# Altium PCB Zenith Solar Panel.PcbDoc (part 1 of 2)
Units mm, origin at the board's own origin, x right, y up, seen from the top; angles counter-clockwise.
Board outline 327.5 x 87 mm, 2 copper layers (Top Layer, Bottom Layer), stack 1.58 mm thick; 57 components, 37 nets, 206 pads, 1487 vias.
Unrouted connection lines stored in the file: 41.
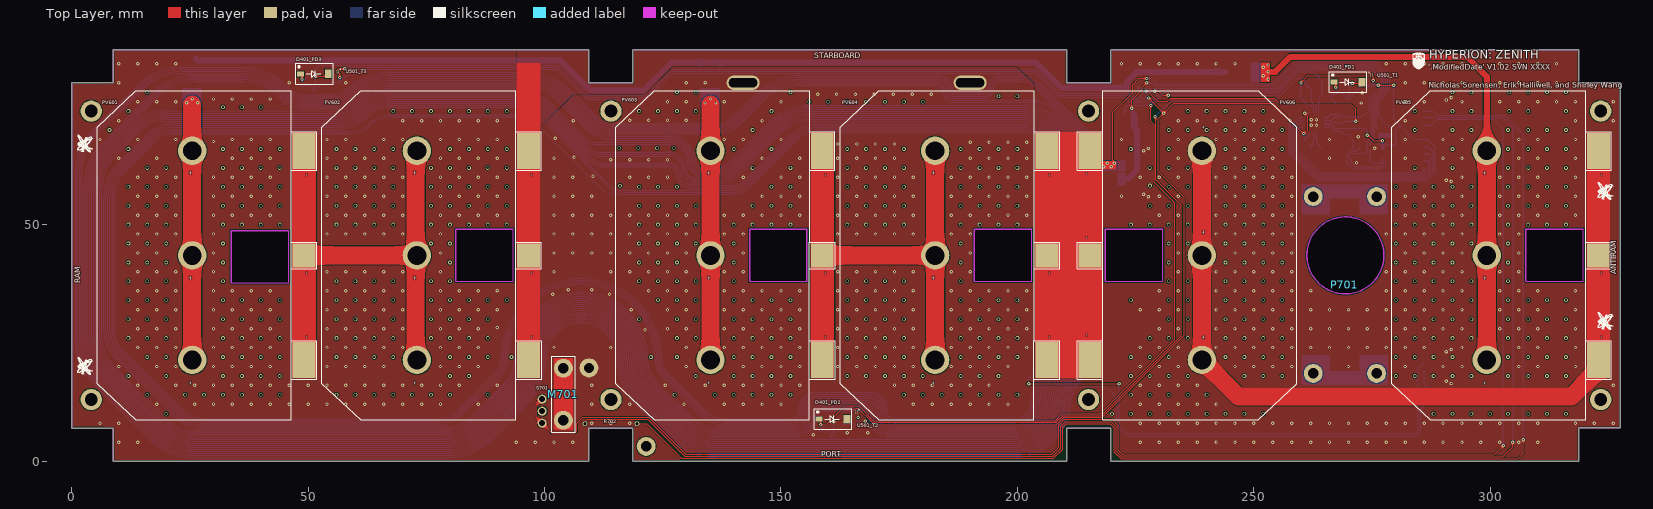
[diagram p0: Top Layer view]
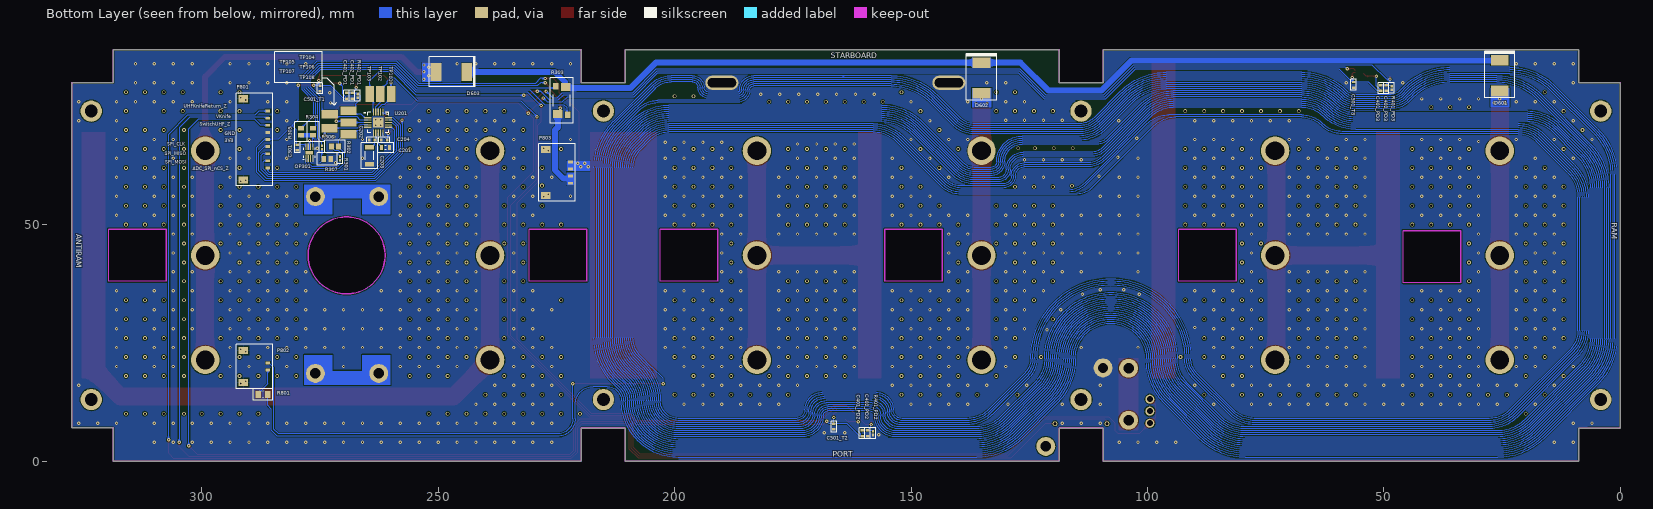
[diagram p1: Bottom Layer view, seen from below]

## Layer stack, top to bottom
Top Solder: solder mask 0.0102, Solder Resist, Dk 3.5
Top Layer: signal copper 0.0356
Dielectric 1: dielectric 1.509, FR-4, Dk 4.8
Bottom Layer: signal copper 0.0356
Bottom Solder: solder mask 0.0102, Solder Resist, Dk 3.5

## Board outline
0,6.985 8.8,6.985 8.8,0 109.4,0 109.4,6.985 118.7,6.985 118.7,0 210.4,0 210.4,6.985 219.7,6.985 219.7,0 318.703,0 318.699,7 327.5,7 327.5,80 318.699,80 318.699,87 219.7,87 219.7,80 210.4,80 210.4,87 118.7,87 118.7,80 109.4,80 109.4,87 8.8,87 8.8,80 0,80
cut-out: 263.6,49.25 cw(c269.35,43.5) 275.1,49.25 cw(c269.35,43.5) 275.1,37.75 cw(c269.35,43.5) 263.6,37.75 cw(c269.35,43.5)
cut-out: 319.65,49 307.5,49 307.5,38 319.65,38
cut-out: 218.6,38 230.75,38 230.75,49 218.6,49
cut-out: 203,49 190.85,49 190.85,38 203,38
cut-out: 155.5,49 143.35,49 143.35,38 155.5,38
cut-out: 45.9,48.75 33.75,48.75 33.75,37.75 45.9,37.75
cut-out: 93.4,49 81.25,49 81.25,38 93.4,38

## Design rules (kind name [scope] priority, off if disabled: settings)
BoardOutlineClearance [All] p1: gap=0.254 ignorepadtopadclearanceinfootprint=FALSE
Clearance [All] p1: gap=0.178 ignorepadtopadclearanceinfootprint=FALSE
HoleSize [All] p1: absolutevalues=TRUE maxlimit=10.16 minlimit=0.3 maxpercent=80.000 minpercent=20.000
MinimumSolderMaskSliver [All] p1: minsoldermaskwidth=0.127
PlaneConnect [All] p1: planeconnectstyle=Direct reliefexpansion=0.508 reliefentries=4 reliefconductorwidth=0.254 reliefairgap=0.254
PolygonConnect [All] p1: connectstyle=Direct reliefconductorwidth=0.254 reliefentries=4 polygonreliefangle="90 Angle" airgapwidth=0.254
RoutingCorners RoutingCorners_1 [All] p1: cornerstyle=45-Degree minsetback=2.54 maxsetback=2.54
RoutingCorners [All] p2: cornerstyle=Round minsetback=2.54 maxsetback=2.54
RoutingVias [All] p1: holewidth=0.33 width=0.711 viastyle="Through Hole" minholewidth=0.2 minwidth=0.711 maxholewidth=6 maxwidth=1.27
SilkToSilkClearance [All] p1: silktosilkclearance=0
SilkToSolderMaskClearance [IsPad] p1: minsilkscreentomaskgap=0.025 clearancetoexposedcopper=TRUE
SolderMaskExpansion [All] p1: expansion=0.013 istentingtop=FALSE
UnRoutedNet [All] p1: checkbadconnections=TRUE
Width [All] p1: maxlimit=10.16 minlimit=0.203 preferedwidth=0.254
23 further rules are at their usual default settings.

## Classes and differential pairs
channel class Temp_Sensor: T1 T2 T3
channel class Photodiode_Sun_Sensor: PD1 PD2 PD3
component class Zenith: TP101 TP102 TP103 TP104 TP105 TP106 TP107 TP108
component class "Zenith Headers": P801 P802 P803 R801
component class T3: C501_T3 U501_T3
component class T2: C501_T2 U501_T2
component class T1: C501_T1 U501_T1
component class PD3: C401_PD3 C402_PD3 D401_PD3 R401_PD3
component class PD2: C401_PD2 C402_PD2 D401_PD2 R401_PD2
component class PD1: C401_PD1 C402_PD1 D401_PD1 R401_PD1
component class "Mechanical Interfacing": M701 P701 R702 S701
component class "Current and Voltage Sensors": C301 OP301 R301 R302 R303 R304 R305 R306 R307
net class VIN[0..7]: VIN0 VIN1 VIN2 VIN3 VIN4 VIN5 VIN6 VIN7
component class "Photovoltaic Array": D601 D602 D603 PV601 PV602 PV603 PV604 PV605 PV606
component class "U_AD7298 12-Bit SPI ADC": C201 C202 C203 C204 U201

## Components (designator, comment, footprint, x,y, rotation, side; value= is the part's Value field where it differs from the comment)
C201 "" TDK-CGA3E 261.11,66.26 r0 bottom value=1µF
C202 "" TDK-CGA2B 263.98,67.89 r0 bottom value=0.1µF
C203 "" TDK-CGA5L 264.51,64.565 r270 bottom value=10µF
C204 "" TDK-CGA2B 261.38,67.89 r0 bottom value=0.1µF
C301 "Cap" TDK-CGA2B 279.75,66.33 r90 bottom value=0.1µF
C401_PD1 "Cap" TDK-CGA2B 269.335,77.24 r270 bottom value=0.1µF (schematic designator C401)
C401_PD2 "Cap" TDK-CGA2B 160.33,5.89 r270 bottom value=0.1µF (schematic designator C401)
C401_PD3 "Cap" TDK-CGA2B 50.66,78.87 r270 bottom value=0.1µF (schematic designator C401)
C402_PD1 "Cap" TDK-CGA2B 268.18,77.24 r90 bottom value=100pF (schematic designator C402)
C402_PD2 "Cap" TDK-CGA2B 159.18,5.89 r90 bottom value=100pF (schematic designator C402)
C402_PD3 "Cap" TDK-CGA2B 49.51,78.87 r90 bottom value=100pF (schematic designator C402)
C501_T1 "Cap" TDK-CGA2B 274.97,78.79 r90 bottom value=0.1µF (schematic designator C501)
C501_T2 "Cap" TDK-CGA2B 166.31,7.29 r90 bottom value=0.1µF (schematic designator C501)
C501_T3 "Cap" TDK-CGA2B 56.4,79.56 r90 bottom value=0.1µF (schematic designator C501)
D401_PD1 "PDB-C160SMCT-ND" PDB-C160SM 266.97,80.15 r0 top (schematic designator D401)
D401_PD2 "PDB-C160SMCT-ND" PDB-C160SM 158.05,8.89 r0 top (schematic designator D401)
D401_PD3 "PDB-C160SMCT-ND" PDB-C160SM 48.37,81.87 r0 top (schematic designator D401)
D601 "MBRS410L" ONS-875 25.5,81.508 r90 bottom
D602 "MBRS410L" ONS-875 135.1,81 r90 bottom
D603 "MBRS410L" ONS-875 247.2,82.3 r180 bottom
M701 "Antenna_Saddle" ANTENNA_SADDLE 104,19.625 r270 top
OP301 "OPA2333" TI-DSG0008A 277.22,65.215 r90 bottom
P701 "Cubesense Mount" CUBESENSE_MOUNT 269.35,43.5 r270 top
P801 "WM25695CT-ND" MOLX-5040500991 286,68 r270 bottom
P802 "WM25693CT-ND" MOLX-5040500291 286,20 r270 bottom
P803 "WM10137CT-ND" MOLX-5040500491 222,61 r270 bottom
PV601 "XTJPrime" "XTJ PRIME" 25.5,43.5 r270 top
PV602 "XTJPrime" "XTJ PRIME" 73,43.5 r270 top
PV603 "XTJPrime" "XTJ PRIME" 135.1,43.5 r270 top
PV604 "XTJPrime" "XTJ PRIME" 182.6,43.5 r270 top
PV605 "XTJPrime" "XTJ PRIME" 299.25,43.5 r270 top
PV606 "XTJPrime" "XTJ PRIME" 239,43.5 r90 top
R301 "0.1% 1/16W" PANA-ERA2A 270.75,64.024 r270 bottom value=6.2k
R302 "0.1% 1/8W" PANA-ERA6A 271.8,66.5 r180 bottom value=1M
R303 "Res Sense" VSH-2512R4C 223.855,76.215 r270 bottom value=0.01
R304 "0.1% 1/8W" PANA-ERA6A 276.425,69.65 r270 bottom value=1M
R305 "0.1% 1/8W" PANA-ERA6A 279.025,69.65 r270 bottom value=845k
R306 "0.1% 1/16W" PANA-ERA2A 274.56,66.326 r270 bottom value=6.2k
R307 "0.1% 1/8W" PANA-ERA6A 273.45,63.885 r180 bottom value=1M
R401_PD1 "0.1% 1/16W" PANA-ERA2A 267.02,77.24 r90 bottom value=24k (schematic designator R401)
R401_PD2 "0.1% 1/16W" PANA-ERA2A 158.03,5.894 r90 bottom value=24k (schematic designator R401)
R401_PD3 "0.1% 1/16W" PANA-ERA2A 48.36,78.876 r90 bottom value=24k (schematic designator R401)
R702 "Res3" VSH-CPF1 119.55,7.9 r180 top value=21
R801 "Res3" VSH-0805MCU 287.025,14.088 r180 bottom value=0
S701 "AV4424" PANA-AV4424 99.5,8 r90 top
TP101 "5017" KS-5017#1 259.71,77.443 r270 bottom
TP102 "5017" KS-5017#2 261.84,77.443 r90 bottom
TP103 "5017" KS-5017#3 264.48,77.59 r90 bottom
TP104 "5017" KS-5017#4 268.98,74.09 r180 bottom
TP105 "5017" KS-5017#4 272.924,73.34 r180 bottom
TP106 "5017" KS-5017#4 268.98,71.59 r180 bottom
TP107 "5017" KS-5017#4 272.98,70.34 r180 bottom
TP108 "5017" KS-5017#4 268.98,69.09 r180 bottom
U201 "AD7298" ADI-CP-20-8 262.68,71.59 r180 bottom
U501_T1 "LMT70" TI-YFQ0004 274.86,81.65 r0 top (schematic designator U501)
U501_T2 "LMT70" TI-YFQ0004 165.94,10.39 r270 top (schematic designator U501)
U501_T3 "LMT70" TI-YFQ0004 56.27,82.3 r270 top (schematic designator U501)

## Footprints (in the part's own frame and the unit in brackets; to place one, negate y for a bottom-side part, rotate by r counter-clockwise, add the part's x,y. Pads: shape width x height; smd on the part's side, far side on the other; paste and mask are expansions set on the pad)
ADI-CP-20-8 [mm] "QFN, 20-Leads, Body 4.00x4.00mm, Pitch 0.50mm, Thermal Pad 2.55x2.55mm, IPC Low Density"
  rect 1.5x0.25 smd: 1(-2.2,1) 2(-2.2,0.5) 3(-2.2,0) 4(-2.2,-0.5) 5(-2.2,-1) 11(2.2,-1) 12(2.2,-0.5) 13(2.2,0) 14(2.2,0.5) 15(2.2,1)
  rect 0.25x1.5 smd: 6(-1,-2.2) 7(-0.5,-2.2) 8(0,-2.2) 9(0.5,-2.2) 10(1,-2.2) 16(1,2.2) 17(0.5,2.2) 18(0,2.2) 19(-0.5,2.2) 20(-1,2.2)
  rect 2.2x2.2 smd: 21(0,0)
  silkscreen extent -2.98,-2.2 2.2,2.2, body extent -2.07,-2.07 2.07,2.07, height 0.8
ANTENNA_SADDLE [mm] "Saddle for attaching antenna to panel"
  round 4 hole 2.2: 8(0,0) 8(11,0)
  Top Layer region: -2.125,-2.125 13.125,-2.125 13.125,2.125 -2.125,2.125
  silkscreen extent -2.5,-2.5 13.5,2.5, body extent -2.06,-2 12.94,2, height 6.91
CUBESENSE_MOUNT [mm]
  round 4 hole 2.2: 6(-12.43,6.6) 6(-12.43,-6.8) 6(24.97,-6.8) 6(24.97,6.6)
  Bottom Layer region: -15,-9.25 -12,-9.25 -12,9 -15,9
  Bottom Layer region: -14.875,3 -8.625,3 -8.625,9 -14.875,9
  Bottom Layer region: -8.625,-3.25 -14.875,-3.25 -14.875,-9.25 -8.625,-9.25
  Bottom Layer region: 21.035,2.98 27.285,2.98 27.285,8.98 21.035,8.98
  Bottom Layer region: 27.285,-3.27 21.035,-3.27 21.035,-9.27 27.285,-9.27
  Bottom Layer region: 27.41,8.98 24.41,8.98 24.41,-9.27 27.41,-9.27
KS-5017#1 [mil] "Testpoint Lug Mini SMD 27X10X152"
  rect 135x70 smd: 1(-6.96,-9.45)
  body extent -53,-20 53,20, height 60
KS-5017#2 [mil] "Testpoint Lug Mini SMD 27X10X152"
  rect 135x70 smd: 1(6.96,16.14)
  body extent -53,-20 53,20, height 60
KS-5017#3 [mil] "Testpoint Lug Mini SMD 27X10X152"
  rect 135x70 smd: 1(1.18,-1.57)
  body extent -53,-20 53,20, height 60
KS-5017#4 [mil] "Testpoint Lug Mini SMD 27X10X152"
  rect 135x70 smd: 1(0,0)
  body extent -53,-20 53,20, height 60
MOLX-5040500291 [mm]
  rect 0.6x1 smd: 1(-0.75,0) 2(0.75,0)
  oval 0.711x0.711 hole 0.33: M1(-3.605,-5.7) M1(-3.105,-4.7) M2(3.105,-4.7) M2(3.605,-5.7)
  rect 1.5x2 smd: M1(-3.355,-5.2) M2(3.355,-5.2)
  silkscreen extent -4.7,-6.7 4.7,1
MOLX-5040500491 [mm]
  rect 0.6x1 smd: 1(-2.25,0) 2(-0.75,0) 3(0.75,0) 4(2.25,0)
  oval 0.711x0.711 hole 0.33: M1(-5.105,-5.7) M1(-4.605,-4.7) M2(4.605,-4.7) M2(5.105,-5.7)
  rect 1.5x2 smd: M1(-4.855,-5.2) M2(4.855,-5.2)
  silkscreen extent -6.1,-6.7 6.1,1, body extent -5.28,-6.05 5.27,0.39, height 2.01
MOLX-5040500991 [mm]
  rect 0.6x1 smd: 1(-6,0) 2(-4.5,0) 3(-3,0) 4(-1.5,0) 5(0,0) 6(1.5,0) 7(3,0) 8(4.5,0) 9(6,0)
  oval 0.711x0.711 hole 0.33: M1(-8.855,-5.7) M1(-8.355,-4.7) M2(8.605,-4.7) M2(8.855,-5.7)
  rect 1.5x2 smd: M1(-8.605,-5.2) M2(8.605,-5.2)
  silkscreen extent -9.8,-6.7 9.8,1
ONS-875 [mm]
  rect 2.25x3.79 smd: 1(-3.25,0) 2(3.25,0)
  silkscreen extent -4.7,-3.2 5.1,3.2, body extent -3.98,-2.95 3.98,2.95, height 2.32
PANA-AV4424 [mm]
  round 1.905 hole 1.27: 1(2.54,0) 2(0,0) 3(5.08,0)
  body extent -1.21,-1.25 6.29,1.25, height 5.81
PANA-ERA2A [mm] "Chip Resistor, 2-Leads, Body 1.00x0.52mm, IPC High Density"
  rect 0.548x0.5 smd: 1(-0.376,0) 2(0.376,0)
  silkscreen extent -1.15,-0.58 1.15,0.58, body extent -0.55,-0.3 0.55,0.3, height 0.4
PANA-ERA6A [mm] "Chip Resistor, 2-Leads, Body 2.00x1.25mm, IPC High Density"
  rect 1x1.25 smd: 1(-0.75,0) 2(0.75,0)
  silkscreen extent -2.15,-1.3 2.15,1.3, body extent -1.1,-0.67 1.1,0.67, height 0.6
PDB-C160SM [mm] "Photodiode"
  rect 1.45x1 smd: 1(0,0)
  rect 1.45x1.8 smd: 2(5.9,0)
  silkscreen extent -1,-2.2 6.9,2.2
TDK-CGA2B [mm] "Chip Capacitor, 2-Leads, Body 1.00x0.50mm, IPC Low Density"
  rect 0.52x0.72 smd: 1(-0.6,0) 2(0.6,0)
  silkscreen extent -1.15,-0.58 1.15,0.58, body extent -0.52,-0.28 0.53,0.27, height 0.5
TDK-CGA3E [mm] "Chip Capacitor, 2-Leads, Body 1.60x0.80mm, IPC Low Density"
  rect 0.65x1.05 smd: 1(-0.85,0) 2(0.85,0)
  silkscreen extent -1.7,-1.05 1.7,1.05, body extent -0.85,-0.45 0.85,0.45, height 0.8
TDK-CGA5L [mm] "Chip Capacitor, 2-Leads, Body 3.20x1.60mm, IPC Low Density"
  rect 0.95x1.9 smd: 1(-1.775,0) 2(1.775,0)
  silkscreen extent -2.75,-1.7 2.75,1.7, body extent -1.7,-0.9 1.7,0.9, height 1.6
TI-DSG0008A [mm] "SON, 8-Leads, Body 2.00x2.00mm, Pitch 0.50mm, Thermal Pad 1.60x0.69mm, IPC Low Density"
  rect 1.4x0.25 smd: 1(-1.245,0.75) 2(-1.245,0.25) 3(-1.245,-0.25) 4(-1.245,-0.75) 5(1.245,-0.75) 6(1.245,-0.25) 7(1.245,0.25) 8(1.245,0.75)
  rect 0.69x1.6 smd: 9(0,0)
  silkscreen extent -1.5,-1.2 1.05,1.25, body extent -1.05,-1.05 1.05,1.05, height 0.8
TI-YFQ0004 [mm] "BGA, 4-Leads, Body 0.88x0.88mmx0.68mm, Pitch 0.40mm"
  round 0.21 smd: A1(-0.2,0.2) A2(0.2,0.2) B1(-0.2,-0.2) B2(0.2,-0.2)
  silkscreen extent -0.59,0.5 -0.5,0.59, body extent -0.44,-0.44 0.44,0.44, height 0.67
VSH-0805MCU [mm] "Chip Resistor, 2-Leads, Body 2.00x1.25mm, IPC Low Density"
  rect 1.15x1.5 smd: 1(-1.025,0) 2(1.025,0)
  silkscreen extent -2.1,-1.25 2.1,1.25, body extent -1.05,-0.7 1.05,0.7, height 0.55
VSH-2512R4C [mm]
  rect 1.65x2.01 smd: 1(-2.855,0.835) 2(2.855,-0.835)
  rect 1.39x1.14 smd: 3(2.999,1.27) 4(-2.999,-1.27)
  silkscreen extent -4.8,-2.45 4.8,2.45
VSH-CPF1 [mm] "RESISTOR METAL FILM 1W 1.00K OHM"
  round 1 hole 0.7: 1(0,0) 2(11,0)
  body extent 0.25,-1.16 10.76,2.29, height 3.81
"XTJ PRIME" [mil] "Spectrolab Solar Cell"
  round 236.22 hole 157.48: 1(-870.5,0) 1(0,0) 1(870.5,0)
  rect 300x190 smd: 2(-870.5,930) 2(870.5,930)
  rect 200x190 smd: 2(0,930)
  silkscreen extent -1369,-790 1369,1038, body extent -1356,-778 1356,778, height 13

## Part data
C201: library part PC-TDK-02603, "CAP CER 1UF 25V X7R 0603", Manufacturer Part Number=CGA3E1X7R1E105K080AC, Supplier Part Number 1=445-6931-1-ND, Temperature Coefficient=X7R, Tolerance=±10%, Voltage - Rated=25V, Applications=Automotive, Index=2603, LatestRevisionDate=3/16/2016, LatestRevisionNote=..., PackageReference="0603 (1608 Metric)", Part Number=PC-TDK-02603, Published=3/16/2016, Publisher=AlbertaSat, Supplier 1=Digi-key, Supplier Link=http://www.digikey.ca/product-search/en?keywords=445-6931-1-ND
C202 C204 C401_PD1 C401_PD2 C401_PD3 C501_T1 C501_T2 C501_T3: library part PC-TDK-02259, "CAP CER 0.1UF 50V X7R 0402", Manufacturer Part Number=CGA2B3X7R1H104K050BB, Supplier Part Number 1=445-6899-1-ND, Temperature Coefficient=X7R, Tolerance=±10%, Voltage - Rated=50V, Applications=Automotive, Index=2259, LatestRevisionNote=..., PackageReference="0402 (1005 Metric)", Part Number=PC-TDK-02259, Publisher=AlbertaSat, Supplier 1=Digi-key, Supplier Link=http://www.digikey.ca/product-search/en?keywords=445-6899-1-ND
  C202 C204: LatestRevisionDate=3/16/2016, Published=3/16/2016
  C401_PD1 C401_PD2 C401_PD3 C501_T1 C501_T2 C501_T3: LatestRevisionDate=2016-03-16, PackageDescription="Radial Cap, Thru-Hole; 2 Leads; 0.3 in Pin Spacing", Published=2016-03-16
C203: library part PC-TDK-02917, "CAP CER 10UF 25V X7R 1206", Manufacturer Part Number=CGA5L1X7R1E106K160AC, Supplier Part Number 1=445-6990-1-ND, Temperature Coefficient=X7R, Tolerance=±10%, Voltage - Rated=25V, Applications=Automotive, Index=2917, LatestRevisionDate=3/16/2016, LatestRevisionNote=..., PackageReference="1206 (3216 Metric)", Part Number=PC-TDK-02917, Published=3/16/2016, Publisher=AlbertaSat, Supplier 1=Digi-key, Supplier Link=http://www.digikey.ca/product-search/en?keywords=445-6990-1-ND
C301: library part PC-TDK-02255, "CAP CER 0.1UF 35V X7R 0402", Manufacturer Part Number=CGA2B3X7R1V104K050BB, Supplier Part Number 1=445-6901-1-ND, Temperature Coefficient=X7R, Tolerance=±10%, Voltage - Rated=35V, Applications=Automotive, Index=2255, LatestRevisionDate=2016-03-16, LatestRevisionNote=..., PackageDescription="Radial Cap, Thru-Hole; 2 Leads; 0.3 in Pin Spacing", PackageReference="0402 (1005 Metric)", Part Number=PC-TDK-02255, Published=2016-03-16, Publisher=AlbertaSat, Supplier 1=Digi-key, Supplier Link=http://www.digikey.ca/product-search/en?keywords=445-6901-1-ND
C402_PD1 C402_PD2 C402_PD3: library part PC-TDK-01227, "CAP CER 100PF 50V C0G 0402", Manufacturer Part Number=CGA2B2C0G1H101J050BA, Supplier Part Number 1=445-5596-1-ND, Temperature Coefficient=NP0, Tolerance=±5%, Voltage - Rated=50V, Applications=Automotive, Index=1227, LatestRevisionDate=2016-03-16, LatestRevisionNote=..., PackageDescription="Radial Cap, Thru-Hole; 2 Leads; 0.3 in Pin Spacing", PackageReference="0402 (1005 Metric)", Part Number=PC-TDK-01227, Published=2016-03-16, Publisher=AlbertaSat, Supplier 1=Digi-key, Supplier Link=http://www.digikey.ca/product-search/en?keywords=445-5596-1-ND
D401_PD1 D401_PD2 D401_PD3: library part PXX-ADP-00000, "SENSOR PHOTODIODE 850NM 2SMD GW", Manufacturer Part Number="Advanced Photonics", Index=1, LatestRevisionDate=3/28/2020, LatestRevisionNote=..., PackageReference=PIN2, Part Number=PXX-ADP-00000, Published=3/28/2020, Publisher=AlbertaSat, Supplier 1=Digi-key, Supplier Part Number 1=PDB-C160SMCT-ND
D601 D602 D603: library part PXX-ONS-00003, "SCHOTTKY BARRIER / RECTIFIERS / 4.0 AMPERES, 10 VOLTS, V_F = 0.31V", Supplier Part Number 1=MBRS410LT3-D, Code_JEDEC=DO-214-AA, Index=3, LatestRevisionDate=1/18/2020, LatestRevisionNote=..., Manufacturer Part Number=MBRS410L, PackageDescription="DO-214-AA/SMB; 2 C-Bend Leads; Body 5.3 x 3.6 mm, inc. leads (LxW)", PackageReference=SMB, Part Number=PXX-ONS-00003, Published=1/18/2020, Publisher=AlbertaSat, Supplier 1=Digi-key, Supplier Link=#https://www.digikey.com/product-detail/en/on-semiconductor/MBRS410LT3G/MBRS410LT3GOSCT-ND/1967073#
M701: library part PXX-ABS-00001, Manufacturer Part Number=Custom, Index=1, LatestRevisionNote=..., Part Number=PXX-ABS-00001, Publisher=AlbertaSat, Supplier 1=Digi-key
OP301: library part 73, "CMOS Amplifier 2 Circuit Rail-to-Rail 8-WSON (2x2)", Manufacturer Part Number=OPA2333PIDSGR, Operating Temperature="-55°C ~ 150°C", Supplier Part Number 1=296-51501-1-ND, Voltage - Supply="1.8V ~ 5.5V, ±0.9V ~ 2.75V", PackageReference="8-WFDFN Exposed Pad", Part Number=73, Supplier 1=Digi-Key, Supplier 2=Mouser, Supplier Link=#https://www.digikey.ca/product-detail/en/texas-instruments/OPA2333PIDSGR/296-51501-1-ND/9745865#, Supplier Part Number 2=595-OPA2333PIDSGR
P701: library part PXX-ABS-00006, Manufacturer Part Number=Custom, Index=6, LatestRevisionNote=..., Part Number=PXX-ABS-00006, Publisher=AlbertaSat, Supplier 1=Digi-key
P801: library part 68, "CONN HEADER SMD R/A 9POS 1.5MM", Manufacturer Part Number=5040500991, LatestRevisionDate=17-Jul-2002, LatestRevisionNote="Re-released for DXP Platform.", Part Number=68, Publisher="Altium Limited", Supplier 1=Digi-Key, Supplier Link=#https://www.digikey.ca/product-detail/en/molex/5040500991/WM25695CT-ND/9954121#, Supplier Part Number 1=WM25695CT-ND
P802: library part 61, "CONN HEADER SMD R/A 2POS 1.5MM", Manufacturer Part Number=5040500291, LatestRevisionDate=17-Jul-2002, LatestRevisionNote="Re-released for DXP Platform.", Part Number=61, Publisher="Altium Limited", Supplier 1=Digi-Key, Supplier Link=#https://www.digikey.ca/product-detail/en/molex/5040500291/WM25693CT-ND/9954119#, Supplier Part Number 1=WM25693CT-ND
P803: library part 63, "CONN HEADER SMD R/A 4POS 1.5MM", Manufacturer Part Number=5040500491, LatestRevisionDate=17-Jul-2002, LatestRevisionNote="Re-released for DXP Platform.", Part Number=63, Publisher="Altium Limited", Supplier 1=Digi-Key, Supplier Link=#https://www.digikey.ca/product-detail/en/molex/5040500491/WM10137CT-ND/4357653#, Supplier Part Number 1=WM10137CT-ND
PV601 PV602 PV603 PV604 PV605 PV606: library part PBT-SPEC-00002, Manufacturer Part Number=Spectrolab, Supplier Part Number 1="UTJ CIC 26.26cm^2", Index=2, LatestRevisionNote=..., PackageReference="3-Connector Solar Cell", Part Number=PBT-SPEC-00002, Publisher=AlbertaSat, Supplier 1=Spectrolab
R301 R306: library part 16853, "RES SMD 6.2K OHM 0.1% 1/16W 0402", Manufacturer Part Number=ERA-2APB622X, Power="0.063W, 1/16W", Supplier Part Number 1=P6.2KCNCT-ND, Temperature Coefficient=±15ppm/°C, Tolerance=±0.1%, LatestRevisionDate=29-May-2009, LatestRevisionNote="IPC-7351 Footprint Added.", PackageDescription="Chip Resistor, 2-Leads, Body 1.00x0.50mm, IPC Low Density", PackageReference="0402 (1005 Metric)", Part Number=16853, Published=8-Jun-2000, Publisher="Altium Limited", Supplier 1=Digi-Key, Supplier Link=http://www.digikey.ca/product-search/en?keywords=P6.2KCNCT-ND
R302 R304 R307: library part 19706, "RES SMD 1M OHM 0.1% 1/8W 0805", Manufacturer Part Number=ERA-6AEB105V, Power="0.125W, 1/8W", Supplier Part Number 1=P1MDACT-ND, Temperature Coefficient=±25ppm/°C, Tolerance=±0.1%, LatestRevisionDate=29-May-2009, LatestRevisionNote="IPC-7351 Footprint Added.", PackageDescription="Chip Resistor, 2-Leads, Body 2.00x1.25mm, IPC Low Density", PackageReference="0805 (2012 Metric)", Part Number=19706, Published=8-Jun-2000, Publisher="Altium Limited", Supplier 1=Digi-Key, Supplier Link=http://www.digikey.ca/product-search/en?keywords=P1MDACT-ND
R303: library part PR-VSH-00237, "RES SMD 0.01 OHM 0.1% 1W 2512", Manufacturer Part Number=Y14870R01000B9W, Power - Rated=1W, Supplier Part Number 1=Y1487-.01-ND, Temperature Coefficient=±15ppm/°C, Tolerance=±0.1%, Applications=Automotive, Index=237, LatestRevisionDate=2017-07-12, LatestRevisionNote=..., PackageReference=VSH-2512R4C, Part Number=PR-VSH-00237, Published=2017-07-12, Publisher=AlbertaSat, Supplier 1=Digi-key, Supplier Link=http://www.digikey.ca/product-search/en?keywords=Y1487-.01-ND
R305: library part 19643, "RES SMD 845K OHM 0.1% 1/8W 0805", Manufacturer Part Number=ERA-6AEB8453V, Power="0.125W, 1/8W", Supplier Part Number 1=P845KDACT-ND, Temperature Coefficient=±25ppm/°C, Tolerance=±0.1%, LatestRevisionDate=29-May-2009, LatestRevisionNote="IPC-7351 Footprint Added.", PackageDescription="Chip Resistor, 2-Leads, Body 2.00x1.25mm, IPC Low Density", PackageReference="0805 (2012 Metric)", Part Number=19643, Published=8-Jun-2000, Publisher="Altium Limited", Supplier 1=Digi-Key, Supplier Link=http://www.digikey.ca/product-search/en?keywords=P845KDACT-ND
R401_PD1 R401_PD2 R401_PD3: library part 17830, "RES SMD 24K OHM 0.1% 1/16W 0402", Manufacturer Part Number=ERA-2APB243X, Power="0.063W, 1/16W", Supplier Part Number 1=P24KCNCT-ND, Temperature Coefficient=±15ppm/°C, Tolerance=±0.1%, LatestRevisionDate=29-May-2009, LatestRevisionNote="IPC-7351 Footprint Added.", PackageDescription="Chip Resistor, 2-Leads, Body 1.00x0.50mm, IPC Low Density", PackageReference="0402 (1005 Metric)", Part Number=17830, Published=8-Jun-2000, Publisher="Altium Limited", Supplier 1=Digi-Key, Supplier Link=http://www.digikey.ca/product-search/en?keywords=P24KCNCT-ND
R702: library part PR-VSH-00317, "21 Ohms ±1% 1W Through Hole Resistor Axial Flame Proof, Moisture Resistant, Safety Metal Film", Manufacturer Part Number=CPF121R000FKEE6, Power - Rated=1W, Supplier Part Number 1=CPF21.0CCT-ND, Temperature Coefficient=±100ppm/°C, Tolerance=±1%, Index=317, LatestRevisionDate=2/27/2020, LatestRevisionNote=..., PackageDescription="Chip Resistor", PackageReference=VSH-CPF1, Part Number=PR-VSH-00317, Published=2/27/2020, Publisher=AlbertaSat, Supplier 1=Digi-key, Supplier Link=#https://www.digikey.ca/product-detail/en/vishay-dale/CPF121R000FKEE6/CPF21.0CCT-ND/2713126#
R801: library part PR-VSH-00003, "RES SMD 0.0 OHM JUMPER 1/5W 0805", Manufacturer Part Number=MCU08050Z0000ZP500, Power - Rated=1/5W, Supplier Part Number 1=MCU0805-0.0-ZZCT-ND, Temperature Coefficient=-, Tolerance=Jumper, Applications="General Purpose", Index=3, LatestRevisionDate=3/14/2016, LatestRevisionNote=..., PackageDescription="Chip Resistor, 2-Leads, Body 2.00x1.25mm, IPC Low Density", PackageReference="0805 (2012 Metric)", Part Number=PR-VSH-00003, Published=3/14/2016, Publisher=AlbertaSat, Supplier 1=Digi-key, Supplier Link=http://www.digikey.ca/product-search/en?keywords=MCU0805-0.0-ZZCT-ND
S701: library part 20035, "SWITCH SNAP ACT SPDT 500MA 30V", Supplier Part Number 1=255-3743-ND, Manufacturer Part Number=AV4424, Part Number=20035, Supplier 1=Digi-Key, Supplier Link=#https://www.digikey.com/product-detail/en/panasonic-electric-works/AV4424/255-3743-ND/646766#
TP101 TP102 TP103 TP104 TP105 TP106 TP107 TP108: library part PTP-KS-00001, "PC TEST POINT MINI SMD", Supplier Part Number 1=36-5017CT-ND, Index=1, LatestRevisionDate=3/15/2016, LatestRevisionNote=..., Manufacturer Part Number=5017, PackageDescription="Testpoint Lug Mini SMD 27X10X152", PackageReference=KS-5017, Part Number=PTP-KS-00001, Published=3/15/2016, Publisher=AlbertaSat, Supplier 1=Digi-key, Supplier 2=Newark, Supplier 3=Mouser, Supplier Link=http://www.digikey.ca/product-detail/en/keystone-electronics/5017/36-5017TR-ND/2217304
U201: library part PU-ADI-00007, "IC ADC 12BIT SAR 20LFCSP-WQ", Manufacturer Part Number=AD7298BCPZ, Supplier Part Number 1=AD7298BCPZ-ND, Index=7, LatestRevisionDate=7/16/2019, LatestRevisionNote=..., PackageDescription="QFN, 20-Leads, Body 4.00x4.00mm, Pitch 0.50mm, Thermal Pad 2.55x2.55mm, IPC Low Density", PackageReference="20-WFQFN Exposed Pad", Part Number=PU-ADI-00007, Published=7/16/2019, Publisher=AlbertaSat, Supplier 1=Digi-key, Supplier 2=Mouser, Supplier Link=#https://www.digikey.ca/product-detail/en/analog-devices-inc/AD7298BCPZ/AD7298BCPZ-ND/2507320#, Supplier Part Number 2=584-AD7298BCPZ
U501_T1 U501_T2 U501_T3: library part 70, "Temperature Sensor Analog, Local -55°C ~ 150°C 5.194mV/°C 4-DSBGA (0.81x0.81)", Manufacturer Part Number=LMT70YFQR, Operating Temperature="-55°C ~ 150°C", Supplier Part Number 1=296-47337-1-ND, PackageReference="BGA, 4-Leads, Body 0.88x0.88mmx0.68mm, Pitch 0.40mm", Part Number=70, Supplier 1=Digi-Key, Supplier Link=#https://www.digikey.ca/product-detail/en/texas-instruments/LMT70YFQR/296-47337-1-ND/7688347#

## Free pads (board coordinates)
  round 4 hole 2.2: 3(109.4,19.687) 3(121.5,3.1)
  oval 7x3 hole 2 slot 6 at 0 deg: 5(142,80) 5(190,80)
  round 4.5 hole 2.7: CHASSIS(4.15,13) CHASSIS(4.15,74) CHASSIS(114.05,13) CHASSIS(114.05,74) CHASSIS(215.05,13) CHASSIS(215.05,74) CHASSIS(323.35,13) CHASSIS(323.35,74)

## Via types
v1: diameter 0.711, hole 0.3, Top Layer to Bottom Layer, tented both sides, 861 vias
v2: diameter 0.8, hole 0.5, Top Layer to Bottom Layer, 624 vias
v3: diameter 0.711, hole 0.3, Top Layer to Bottom Layer, 2 vias

## Nets (pads, with @x,y where several pads share a name; then routed paths per layer and width w, separated by ;. In a path a pad name is that pad's centre, name@x,y a point inside that pad or via, vN(x,y) a via of type N, cw(c..) or ccw(c..) an arc to the next point about the centre after c; other vN are vias at no path point)
3V3: C204.1 C301.2 C401_PD1.2 C401_PD2.2 C401_PD3.2 C501_T1.2 C501_T2.2 C501_T3.2 D401_PD1.2 D401_PD2.2 D401_PD3.2 OP301.8 P801.5 U201.10 U201.16 U501_T1.A2 U501_T1.B2 U501_T2.A2 U501_T2.B2 U501_T3.A2 U501_T3.B2 | length 477
  Top Layer w0.203: v1(51.58,81.34) 53.74,81.34 D401_PD3.2@54.25,81.85 ; U501_T3.B2@56.07,82.1 U501_T3.A2@56.47,82.1 56.68,81.89 v1(56.68,81.11) ; v1(161.16,8.34) 163.4,8.34 D401_PD2.2@163.93,8.87 ; U501_T2.B2@165.74,10.19 U501_T2.A2@166.14,10.19 166.34,9.99 v1(166.34,9.21) ; v1(260.55,69.26) 261.39,70.1 261.39,72.91 v1(260.77,73.53) ; v1(270.79,79.87) 272.59,79.87 D401_PD1.2@272.87,80.15 ; U501_T1.A2@275.06,81.85 U501_T1.B2@275.06,81.45 275.26,81.25 v1(275.26,80.47) ; v1(276.27,79.49) v1(279.6,79.49)
  Top Layer w0.254: v1(167.85,8.42) 168.55,7.72 208.258,7.72 209.763,9.225 217.92,9.225 235.25,26.555 235.25,55.747 229.75,61.247 229.75,72.35 v1(230.965,73.565) ; v1(227.76,76.77) v1(230.965,73.565) ; v1(260.55,69.26) 260.44,69.26 254.09,75.61 233.01,75.61 v1(230.965,73.565)
  Bottom Layer w0.203: C401_PD2.2@160.33,5.29 160.85,5.29 163.45,7.89 C501_T2.2@166.31,7.89 ; C401_PD2.2@160.515,5.38 160.578,5.443 160.578,5.723 161.16,6.305 v1(161.16,8.34) ; v1(166.34,9.21) 166.308,9.178 C501_T2.2@166.31,7.89 ; v1(167.85,8.42) 167.32,7.89 C501_T2.2@166.31,7.89 C501_T2.2@166.31,7.89 ; v1(260.55,69.26) 260.647,69.163 260.647,68.023 C204.1@260.78,67.89 260.78,67.99 260.938,68.148 261.063,68.148 261.68,68.765 U201.10@261.68,69.39 ; v1(260.77,73.53) 261.657,73.53 261.68,73.553 U201.16@261.68,73.79 ; C401_PD1.2@269.335,76.64 269.425,76.64 269.583,76.798 269.583,77.073 270.21,77.7 270.21,79.29 v1(270.79,79.87) ; C401_PD1.2@269.435,76.64 269.91,76.64 272.66,79.39 C501_T1.2@274.97,79.39 275.02,79.44 C501_T1.2@275.12,79.44 ; v1(275.26,80.47) 275.228,80.438 275.228,79.548 C501_T1.2@275.12,79.44 ; v1(276.27,79.49) 276.22,79.44 C501_T1.2@275.12,79.44 ; OP301.8@277.97,66.46 277.97,66.907 277.993,66.93 C301.2@279.75,66.93 279.85,66.93 280.008,67.088 280.008,70.008 280.91,70.91 ; v1(279.6,79.49) 279.6,72.22 280.91,70.91 ; P801.5@286,68 283.82,68 280.91,70.91
  Bottom Layer w0.254: C401_PD3.2@50.816,78.403 50.816,78.657 51.064,78.905 51.146,78.905 51.58,79.339 v1(51.58,81.34) ; C401_PD3.2@50.83,78.35 50.91,78.27 51.36,78.27 53.245,80.155 56.395,80.155 C501_T3.2@56.4,80.16 56.648,80.16 C501_T3.2@56.648,80.24 ; v1@56.648,81.078 C501_T3.2@56.648,80.24 ; v1(227.76,76.77) 226.85,75.86 223.81,75.86 222.703,76.967 208.633,76.967 203.617,81.984 127.203,81.984 121.774,76.555 108.95,76.555 102.604,82.901 59.431,82.901 56.77,80.24 C501_T3.2@56.648,80.24 ; v1(257.64,72.08) 257.595,72.035 257.595,71.343 257.456,71.204 257.456,65.089 263.285,59.259 286.509,59.259 288.364,61.114 288.364,66.346 286.709,68 P801.5@286,68
ADC_SPI_nCS_Z: P801.9 U201.11 | length 35.3
  Bottom Layer w0.254: U201.11@260.48,70.59 259.859,70.59 259.183,69.914 259.183,65.804 264,60.986 285.568,60.986 286,61.418 P801.9@286,62
GND: C201.1 C202.2 C203.2 C204.2 C301.1 C402_PD1.1 C402_PD2.1 C402_PD3.1 C501_T1.1 C501_T2.1 C501_T3.1 OP301.4 P801.4 P801.M1 P801.M2 P802.M1 P802.M2 P803.M1 P803.M2 pad.3@109.4,19.687 pad.5 R307.2 R401_PD1.1 R401_PD2.1 R401_PD3.1 S701.1 U201.6 U201.9 U201.21 U501_T1.A1 U501_T2.A1 U501_T3.A1
  other v1: 10,4 14,4 94,4 98,4 102,4 106,4 226,4 230,4 234,4 238,4 242,4 246,4 250,4 254,4 258,4 262,4 266,4 270,4 274,4 278,4 282,4 286,4 290,4 294,4 298,4 302,4 306,4 310,4 156.797,5.526 164,5.962 168.358,5.958 6,8 10,8 110,8 114,8 118,8 226,8 230,8 234,8 238,8 242,8 246,8 250,8 254,8 258,8 262,8 266,8 270,8 274,8 278,8 282,8 286,8 290,8 294,8 298,8 302,8 306,8 310,8 318,8 322,8 326,8 18,12 26,12 30,12 34,12 38,12 42,12 46,12 50,12 54,12 58,12 62,12 66,12 70,12 74,12 78,12 86,12 110,12 118,12 129.5,12 138,12 142,12 146,12 150,12 178,12 182,12 186,12 190,12 194,12 198,12 226,12 230,12 234,12 238,12 242,12 14,16 22,16 26,16 30,16 34,16 38,16 42,16 46,16 50,16 54,16 58,16 62,16 66,16 70,16 74,16 78,16 82,16 90,16 110,16 125.5,16 134,16 138,16 142,16 146,16 150,16 154,16 174,16 178,16 182,16 186,16 190,16 194,16 226,16 230,16 234,16 238,16 326,16 10,20 18,20 22,20 30,20 34,20 38,20 42,20 54,20 58,20 62,20 66,20 78,20 82,20 86,20 130,20 142,20 146,20 150,20 154,20 162,20 166,20 170,20 174,20 178,20 186,20 190,20 194,20 198,20 226,20 230,20 234,20 246,20 250,20 254,20 258,20 270,20 282,20 290,20 294,20 306,20 310,20 318,20 14,24 18,24 22,24 30,24 34,24 38,24 42,24 54,24 58,24 62,24 66,24 70,24 78,24 82,24 86,24 102,24 114,24 130,24 138,24 142,24 146,24 150,24 154,24 162,24 166,24 170,24 174,24 178,24 186,24 190,24 194,24 198,24 202,24 226,24 230,24 234,24 242,24 246,24 250,24 254,24 258,24 262,24 266,24 270,24 274,24 278,24 282,24 286,24 294,24 306,24 310,24 318,24 121.25,27.75 14,28 18,28 22,28 30,28 34,28 38,28 42,28 54,28 58,28 62,28 66,28 70,28 78,28 82,28 86,28 126,28 130,28 138,28 142,28 146,28 150,28 154,28 162,28 166,28 170,28 174,28 178,28 186,28 190,28 194,28 198,28 202,28 230,28 234,28 242,28 246,28 250,28 254,28 258,28 262,28 266,28 270,28 274,28 278,28 282,28 286,28 290,28 294,28 302,28 306,28 310,28 318,28 90,28.25 14,32 18,32 22,32 30,32 34,32 38,32 42,32 54,32 58,32 62,32 66,32 70,32 78,32 82,32 86,32 90,32 118.319,32 126,32 130,32 138,32 142,32 146,32 150,32 154,32 162,32 166,32 170,32 174,32 178,32 186,32 190,32 194,32 198,32 202,32 226,32 230,32 234,32 242,32 246,32 250,32 254,32 258,32 262,32 266,32 270,32 274,32 278,32 282,32 286,32 290,32 294,32 302,32 306,32 310,32 318,32 101.75,35.25 113.75,35.25 14,36 18,36 22,36 30,36 34,36 38,36 42,36 54,36 58,36 62,36 66,36 70,36 78,36 82,36 86,36 90,36 122,36 126,36 130,36 138,36 142,36 146,36 150,36 154,36 162,36 166,36 170,36 174,36 178,36 186,36 190,36 194,36 198,36 202,36 230,36 234,36 242,36 246,36 250,36 254,36 258,36 262,36 278,36 282,36 286,36 290,36 294,36 302,36 306,36 310,36 318,36 105,36.25 110,36.25 14,40 18,40 22,40 30,40 54,40 58,40 62,40 66,40 70,40 78,40 102,40 114,40 118,40 122,40 126,40 130,40 138,40 142,40 162,40 166,40 170,40 174,40 178,40 186,40 190,40 234,40 242,40 246,40 250,40 254,40 258,40 278,40 282,40 286,40 290,40 294,40 302,40 306,40 14,44 18,44 30,44 78,44 102,44 106,44 110,44 114,44 118,44 122,44 126,44 130,44 142,44 190,44 234,44 246,44 250,44 254,44 258,44 282,44 286,44 290,44 294,44 306,44 14,48 18,48 22,48 30,48 54,48 58,48 62,48 66,48 70,48 78,48 102,48 106,48 110,48 114,48 118,48 122,48 126,48 130,48 138,48 142,48 162,48 166,48 170,48 174,48 178,48 186,48 190,48 234,48 242,48 246,48 250,48 254,48 258,48 278,48 282,48 286,48 290,48 294,48 302,48 306,48 14,52 18,52 22,52 30,52 34,52 38,52 42,52 54,52 58,52 62,52 66,52 70,52 78,52 82,52 86,52 90,52 102,52 106,52 110,52 114,52 118,52 122,52 126,52 130,52 138,52 142,52 146,52 150,52 154,52 162,52 166,52 170,52 174,52 178,52 186,52 190,52 194,52 198,52 202,52 230,52 234,52 242,52 246,52 250,52 254,52 258,52 282,52 286,52 290,52 294,52 302,52 306,52 310,52 318,52 14,56 18,56 22,56 30,56 34,56 38,56 42,56 54,56 58,56 62,56 66,56 70,56 78,56 82,56 86,56 90,56 102,56 106,56 110,56 146,56 150,56 154,56 162,56 166,56 170,56 174,56 178,56 186,56 190,56 194,56 198,56 202,56 222,56 230,56 234,56 242,56 246,56 250,56 254,56 258,56 282,56 286,56 290,56 294,56 302,56 306,56 310,56 318,56 14,60 18,60 22,60 30,60 34,60 38,60 42,60 54,60 58,60 62,60 66,60 70,60 78,60 82,60 86,60 90,60 102,60 106,60 118,60 122,60 126,60 142,60 150,60 154,60 162,60 166,60 170,60 174,60 178,60 186,60 190,60 194,60 198,60 202,60 226,60 230,60 234,60 242,60 246,60 250,60 254,60 258,60 294,60 302,60 306,60 310,60 318,60 110.244,60.25 271.711,63.101 114,63.75 118,63.75 122,63.75 126,63.75 10,64 18,64 34,64 38,64 42,64 54,64 58,64 62,64 66,64 78,64 82,64 86,64 90,64 102,64 146,64 154,64 162,64 166,64 170,64 174,64 190,64 194,64 198,64 202,64 234,64 246,64 250,64 254,64 266,64 282,64 290,64 294,64 306,64 310,64 318,64 106.244,64.25 275.579,66.118 162,67.039 166,67.039 170,67.039 174,67.039 190,67.402 194,67.402 198,67.402 202,67.402 29.988,67.569 6,68 14,68 22,68 34,68 38,68 42,68 54,68 58,68 66,68 70,68 78,68 82,68 86,68 90,68 138,68 142,68 150,68 222,68 234,68 242,68 246,68 250,68 254,68 266,68 282,68 290,68 294,68 306,68 310,68 318,68 102.244,68.25 272.093,68.589 262.13,71.04 263.23,71.04 106.109,71.927 10,72 70,72 74,72 78,72 82,72 86,72 90,72 146,72 234,72 238,72 242,72 246,72 250,72 254,72 282,72 318,72 326,72 118,72.038 122,72.038 126,72.038 130,72.038 262.13,72.14 263.23,72.14 272.682,75.724 14,76 18,76 22,76 126,76 130,76 138,76 150,76 282,76 286,76 294,76 302,76 306,76 310,76 314,76 318,76 326,76 30,76.571 34,76.571 38,76.571 42,76.571 157.75,77.566 161.75,77.566 165.75,77.566 169.75,77.566 173.75,77.566 177.75,77.566 181.75,77.566 272.936,77.896 10,80 46,80 58,80 130,80 134,80 282,80 286,80 290,80 294,80 302,80 306,80 310,80 314,80 10,84 14,84 18,84 22,84 222,84 226,84 230,84 234,84 238,84 242,84 246,84 278,84 282,84 286,84 290,84 294,84 302,84 306,84 310,84 314,84

## Text inside footprints (layer, text, board x,y; h text height)
PV605: Top Overlay "-" at 323.25,60.645 h0.7 r270; Top Overlay "-" at 323.25,39.944 h0.7 r270; Top Overlay "-" at 323.278,26.406 h0.7 r270; Top Overlay "+" at 298.615,61.28 h0.7 r270; Top Overlay "+" at 298.615,39.055 h0.7 r270; Top Overlay "+" at 298.615,16.83 h0.7 r270
PV606: Top Overlay "+" at 239.635,70.17 h0.7 r90; Top Overlay "+" at 239.635,47.945 h0.7 r90; Top Overlay "+" at 239.635,25.72 h0.7 r90; Top Overlay "-" at 214.972,60.594 h0.7 r90; Top Overlay "-" at 215,47.056 h0.7 r90; Top Overlay "-" at 215,26.355 h0.7 r90